# Altium PCB pcb.PcbDoc
Units mm, origin at the board's own origin, x right, y up, seen from the top; angles counter-clockwise.
Board outline 92 x 14 mm, 2 copper layers (Top Layer, Bottom Layer), stack 1.58 mm thick; 6 components, 6 nets, 30 pads, 0 vias.
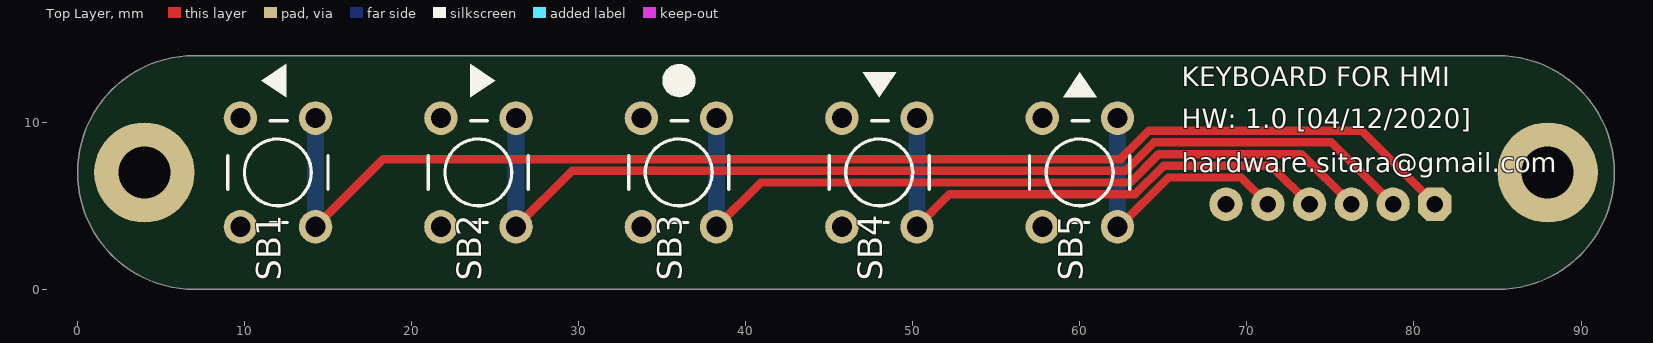
[diagram p0: Top Layer view]
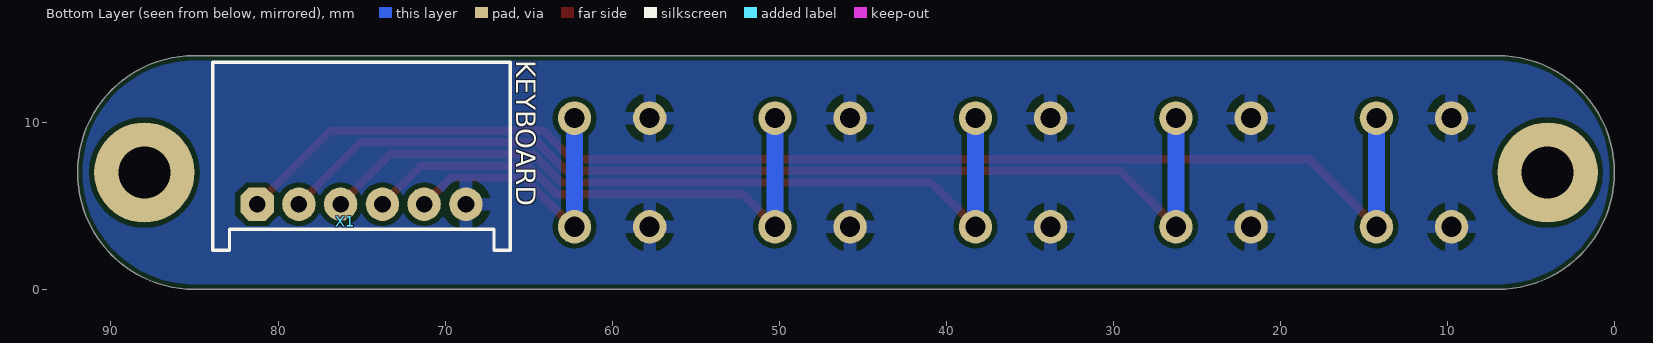
[diagram p1: Bottom Layer view, seen from below]
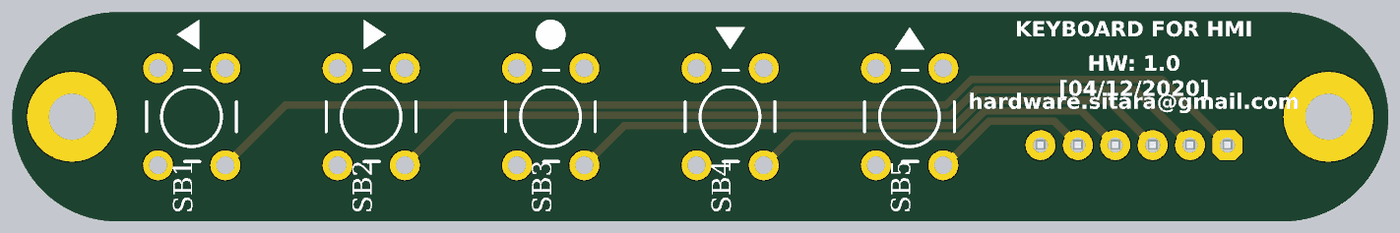
[diagram p2: 3D render of the assembled board from above, using the file's embedded part models]

## Layer stack, top to bottom
Top Solder: solder mask 0.0102, Solder Resist, Dk 3.5
Top Layer: signal copper 0.0356
Dielectric 1: dielectric 1.509, FR-4, Dk 4.8
Bottom Layer: signal copper 0.0356
Bottom Solder: solder mask 0.0102, Solder Resist, Dk 3.5

## Board outline
7,0 cw(c7,7) 7,14 85,14 cw(c85,7) 85,0

## Design rules (kind name [scope] priority, off if disabled: settings)
BoardOutlineClearance [All] p1: gap=0.3 ignorepadtopadclearanceinfootprint=FALSE
Clearance Clearance_MultiLayerPad [OnLayer('Multi-Layer') and IsPad] p1: gap=0.3 ignorepadtopadclearanceinfootprint=FALSE except(0: Arc-Hole Track-Hole SMDPad-Hole THPad-Hole Via-Hole Fill-Hole Poly-Hole Region-Hole Text-Hole)
Clearance Clearance_Polygon [InPolygon] p2: gap=0.2 ignorepadtopadclearanceinfootprint=FALSE except(0: Arc-Hole Track-Hole SMDPad-Hole THPad-Hole Via-Hole Fill-Hole Poly-Hole Region-Hole Text-Hole; 0.3: Arc-Poly Arc-Region Track-Poly Track-Region SMDPad-Poly SMDPad-Region THPad-Poly THPad-Region Via-Poly Via-Region Fill-Poly Fill-Region Poly-Poly Poly-Region Region-Region)
Clearance [All] p3: gap=0.2 ignorepadtopadclearanceinfootprint=FALSE except(0: Arc-Hole Track-Hole SMDPad-Hole THPad-Hole Via-Hole Fill-Hole Poly-Hole Region-Hole Text-Hole)
ComponentClearance [All] p1: gap=0.5 collisioncheckmode=3 verticalgap=0.5 showdistances=FALSE
DiffPairsRouting [All] p1: maxlimit=0.4 minlimit=0.2 mostfreqgap=0.2 toplayer_minwidth=0.2 toplayer_maxwidth=0.3 toplayer_prefwidth=0.2 bottomlayer_minwidth=0.2 bottomlayer_maxwidth=0.3 bottomlayer_prefwidth=0.2 maxuncoupledlength=12.7
Height [All] p1: minheight=0 maxheight=50 prefheight=12.7
HoleSize [All] p1: absolutevalues=TRUE maxlimit=10 minlimit=0.2 maxpercent=80.000 minpercent=20.000
HoleToHoleClearance [All] p1: gap=0.3 allowstackedmicrovias=TRUE
MinimumSolderMaskSliver [All] p1: minsoldermaskwidth=0.2
PlaneClearance [All] p1: clearance=0.5
PlaneConnect [All] p1: planeconnectstyle=Relief reliefexpansion=0.5 reliefentries=4 reliefconductorwidth=0.5 reliefairgap=0.3
PolygonConnect PolygonConnect_PadGND [InNet('GND') and IsPad] p1: connectstyle=Relief reliefconductorwidth=0.8 reliefentries=4 polygonreliefangle="90 Angle" airgapwidth=0.5
PolygonConnect PolygonConnect_Via [IsVia] p2: connectstyle=Direct reliefconductorwidth=0.254 reliefentries=4 polygonreliefangle="90 Angle" airgapwidth=0.254
PolygonConnect [All] p3: connectstyle=Relief reliefconductorwidth=0.6 reliefentries=4 polygonreliefangle="90 Angle" airgapwidth=0.5
RoutingTopology [All] p1: topology=Vertical
RoutingVias [All] p1: holewidth=0.2 width=0.4 viastyle="Through Hole" minholewidth=0.2 minwidth=0.4 maxholewidth=0.5 maxwidth=1.2
SilkToSolderMaskClearance [IsPad] p1: minsilkscreentomaskgap=0.2 clearancetoexposedcopper=TRUE
SolderMaskExpansion [All] p1: expansion=0.075 istentingtop=FALSE
Width [All] p1: maxlimit=10 minlimit=0.2 preferedwidth=0.2
20 further rules are at their usual default settings.

## Components (designator, comment, footprint, x,y, rotation, side; value= is the part's Value field where it differs from the comment)
SB1 "Tactile button, 6x6mm" "BUT: 6x6" 12,7 r90 top
SB2 "Tactile button, 6x6mm" "BUT: 6x6" 24,7 r90 top
SB3 "Tactile button, 6x6mm" "BUT: 6x6" 36,7 r90 top
SB4 "Tactile button, 6x6mm" "BUT: 6x6" 48,7 r90 top
SB5 "Tactile button, 6x6mm" "BUT: 6x6" 60,7 r90 top
X1 "Connector, 6pin, 2.54mm, 250VAC, 3A" "CON: CWF-6R" 75,5.1 r180 bottom

## Footprints (in the part's own frame and the unit in brackets; to place one, negate y for a bottom-side part, rotate by r counter-clockwise, add the part's x,y. Pads: shape width x height; smd on the part's side, far side on the other; paste and mask are expansions set on the pad)
"BUT: 6x6" [mm] "Leaded Tactile Button 6x6"
  round 2 hole 1.2: 1(-3.25,2.25) 1(3.25,2.25) 2(-3.25,-2.25) 2(3.25,-2.25)
  silkscreen extent -3,-2.99 3.1,3.01, body extent -3.15,-2.96 3.25,3.04, height 4.5
"CON: CWF-6R" [mm]
  oct 2x2 hole 1: 1(-6.25,0)
  round 2 hole 1: 2(-3.75,0) 3(-1.25,0) 4(1.25,0) 5(3.75,0) 6(6.25,0)
  round 0.5 on Mech2: ""(-8.2,-2.1)
  round 0.5 on Bottom Overlay: ""(-7.5,-1)
  silkscreen extent -8.9,-2.75 8.9,8.5, body extent -8.75,-2.6 8.75,8.9, height 5.85

## Part data
SB1 SB2 SB3 SB4 SB5: library part Button_tactile, Manufacturer="TE Connectivity", Package=6x6mm, PartNumber=FSM2JSMAATR, HelpURL=https://www.digikey.com/product-detail/en/te-connectivity-alcoswitch-switches/FSM2JSMAATR/450-1792-1-ND/3503931, TypeButton="Tactile button", ValueManufacturerPartNumber="Tactile button, 6x6mm"
  SB1: CommentText="\"Up\""
  SB2: CommentText="\"Down\""
  SB3: CommentText="\"Ok\""
  SB4: CommentText="\"Left\""
  SB5: CommentText="\"Right\""
X1: library part CWF-6, CurrentMax=3A, Manufacturer=Connfly, PartNumber=CWF-6R, VoltageMax=250VAC, CommentText="\"Keyboard\"", HelpURL=https://www.chipdip.ru/product/cwf-6r-ds1069-6-mr, Multichannel=6pin, Pitch=2.54mm, TypeConnector=Connector, ValueManufacturerPartNumber="Connector, 6pin, 2.54mm, 250VAC, 3A"

## Free pads (board coordinates)
  round 6 hole 3.1 mask+0.075: MH(4,7) MH(88,7)

## Nets (pads, with @x,y where several pads share a name; then routed paths per layer and width w, separated by ;. In a path a pad name is that pad's centre, name@x,y a point inside that pad or via, vN(x,y) a via of type N, cw(c..) or ccw(c..) an arc to the next point about the centre after c; other vN are vias at no path point)
GND: SB1.1 SB2.1 SB3.1 SB4.1 SB5.1 X1.6
NetSB1_2: SB1.2 X1.1 | length 77.7
  Top Layer w0.5: SB1.2@14.25,3.75 18.3,7.8 62.44,7.8 64.14,9.5 76.85,9.5 X1.1
  Bottom Layer w1: SB1.2@14.25,3.75 SB1.2@14.25,10.25
NetSB2_2: SB2.2 X1.2 | length 62.6
  Top Layer w0.5: SB2.2@26.25,3.75 29.6,7.1 62.73,7.1 64.43,8.8 75.05,8.8 X1.2
  Bottom Layer w1: SB2.2@26.25,3.75 SB2.2@26.25,10.25
NetSB3_2: SB3.2 X1.3 | length 47.5
  Top Layer w0.5: SB3.2@38.25,3.75 40.9,6.4 63.02,6.4 64.72,8.1 73.25,8.1 X1.3
  Bottom Layer w1: SB3.2@38.25,3.75 SB3.2@38.25,10.25
NetSB4_2: SB4.2 X1.4 | length 32.5
  Top Layer w0.5: SB4.2@50.25,3.75 52.2,5.7 63.31,5.7 65.01,7.4 71.45,7.4 X1.4
  Bottom Layer w1: SB4.2@50.25,3.75 SB4.2@50.25,10.25
NetSB5_2: SB5.2 X1.5 | length 17.4
  Top Layer w0.5: SB5.2@62.25,3.75 62.35,3.75 65.3,6.7 69.65,6.7 X1.5
  Bottom Layer w1: SB5.2@62.25,3.75 SB5.2@62.25,10.25
pads on no net: X1.

## Polygon pours and split planes (outlines as drawn)
GND on Bottom Layer "GND" (solid, pour order 0): 0,14 0,0 92,0 92,14

## Silkscreen, mask and mechanical layers (free items; w line width, h text height)
Top Overlay:
  circle w0.2: c36,12.5 r0.9
  region: 35.3,13.1 35.6,13.3 35.9,13.4 36.3,13.3 36.6,13.2 36.7,13 36.9,12.8 36.9,12.2 36.7,12 36.5,11.7 36.2,11.6 35.8,11.6 35.4,11.8 35.2,12.1 35.1,12.4 35.1,12.7 35.2,13
  region: 59,11.5 61,11.5 60,13
  region: 49,13 47,13 48,11.5
  region: 23.5,13.5 23.5,11.5 25,12.5
  region: 12.5,11.5 12.5,13.5 11,12.5
  region: 14,12
  text "KEYBOARD FOR HMI" at 66.1,11.769 h2
  text "HW: 1.0 [04/12/2020]" at 66.1,9.266 h2
  text "hardware.sitara@gmail.com" at 66.1,6.614 h2
Bottom Overlay:
  text "KEYBOARD" at 66.131,13.726 h2 r90
Border:
  the board outline again, w0.2

## Dimensions
0,7 to 92,7 on Size
7,0 to 7,14 on Size